# Altium PCB construction.PcbDoc
Units mm, origin at the board's own origin, x right, y up, seen from the top; angles counter-clockwise.
Board outline 204 x 297 mm, 2 copper layers (TopLayer, BottomLayer); 10 components, 162 nets, 348 pads, 0 vias.
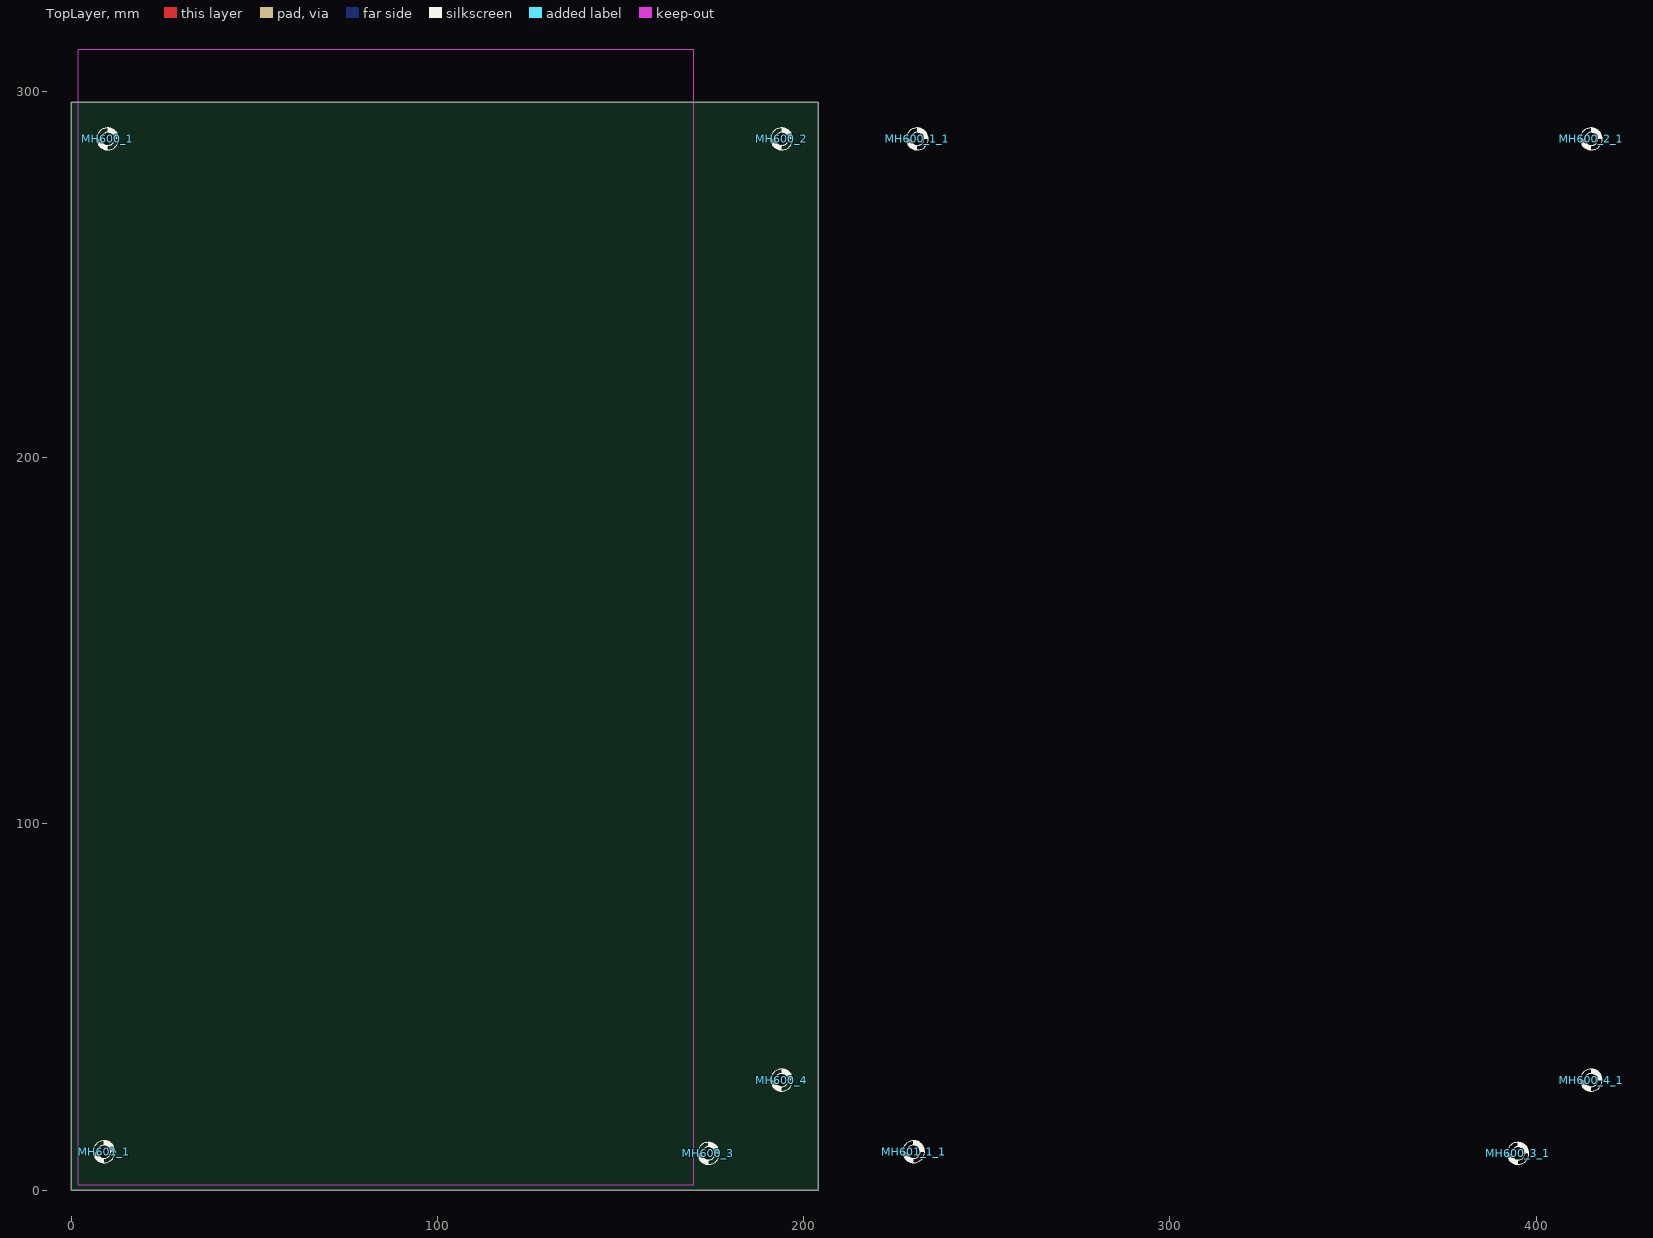
[diagram p0: TopLayer view]
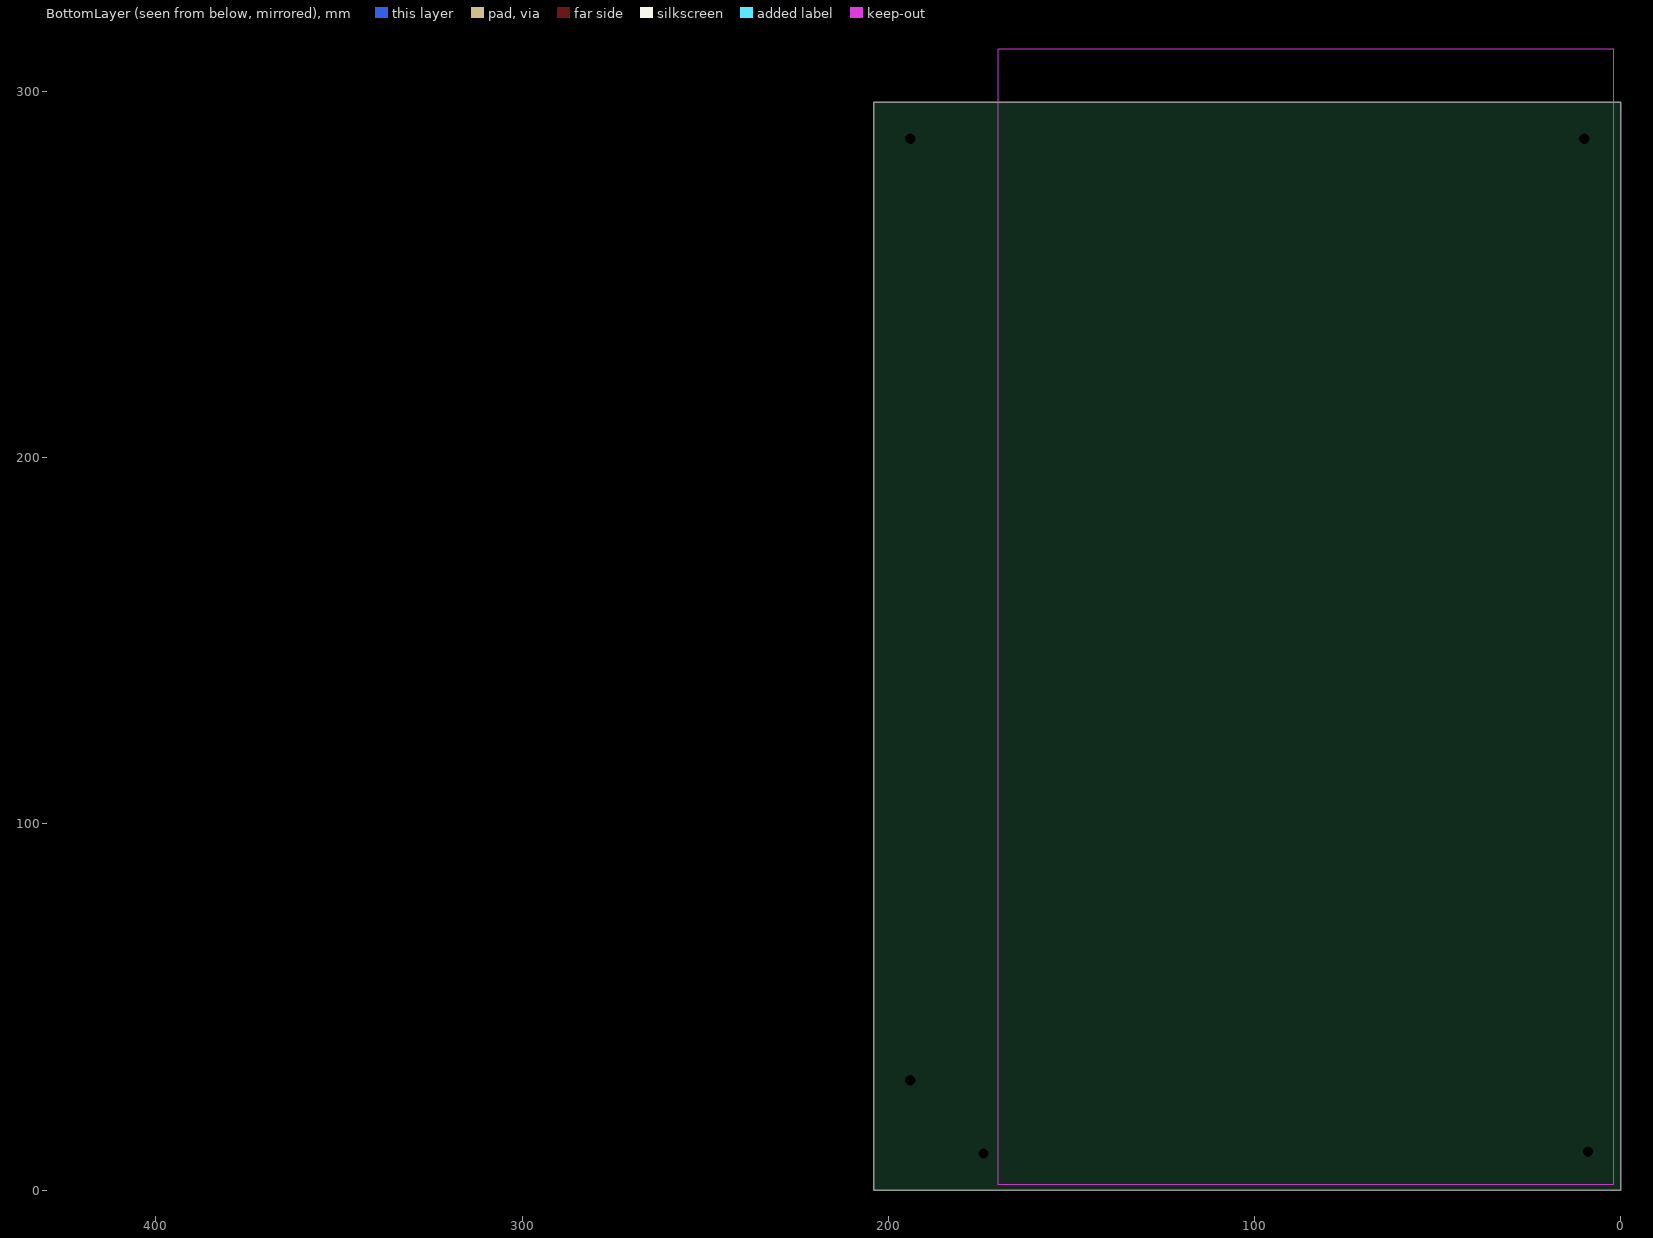
[diagram p1: BottomLayer view, seen from below]

## Layer stack, top to bottom
TopSolder: solder mask 0.0102, Solder Resist, Dk 3.5
TopLayer: signal copper 0.0356
Dielectric1: dielectric 0.32, FR-4, Dk 4.8
BottomLayer: signal copper 0.0356
BottomSolder: solder mask 0.0102, Solder Resist, Dk 3.5

## Board outline
0,0 0,297 204,297 204,0

## Design rules (kind name [scope] priority, off if disabled: settings)
Clearance Clearance_1 [All vs InPolygon] p1: gap=0.4 ignorepadtopadclearanceinfootprint=FALSE except(0: Arc-Hole Track-Hole SMDPad-Hole THPad-Hole Via-Hole Fill-Hole Poly-Hole Region-Hole Text-Hole)
Clearance [All] p2: gap=0.254 ignorepadtopadclearanceinfootprint=FALSE except(0: Arc-Hole Track-Hole SMDPad-Hole THPad-Hole Via-Hole Fill-Hole Poly-Hole Region-Hole Text-Hole)
ComponentClearance [All] p1: gap=0 collisioncheckmode=3 verticalgap=0 showdistances=FALSE
FabricationTestPointUsage TestPointUsage [All] p1: valid=0 allowmultiple=FALSE
FabricationTestpoint Testpoint [(IsPad And (OnTopLayer Or OnBottomLayer))] p1: side=3 testpointundercomponent=TRUE minsize=1.016 maxsize=2.54 preferedsize=1.524 minholesize=0.508 maxholesize=1.016 preferedholesize=0.813 testpointgrid=0.025 allowsidetop=TRUE allowsidebottom=TRUE usegrid=TRUE gridtolerance=0
HoleSize [All] p1: absolutevalues=TRUE maxlimit=4 minlimit=0.4 maxpercent=80.000 minpercent=20.000
HoleToHoleClearance [All] p1: gap=0.5 allowstackedmicrovias=TRUE
MinimumAnnularRing [All] p1: minimumring=0.18
MinimumSolderMaskSliver [All] p1: minsoldermaskwidth=0.15
PlaneClearance [All] p1: clearance=0.254
PlaneConnect [All] p1: planeconnectstyle=Relief reliefexpansion=0.508 reliefentries=4 reliefconductorwidth=0.381 reliefairgap=0.254
PolygonConnect PolygonConnect_1 [(InPadClass('All Pads'))] p1: connectstyle=Relief reliefconductorwidth=0.635 reliefentries=4 polygonreliefangle="90 Angle" airgapwidth=0.254
PolygonConnect [All] p2: connectstyle=Direct reliefconductorwidth=0.61 reliefentries=4 polygonreliefangle="90 Angle" airgapwidth=0.254
RoutingVias [All] p1: holewidth=0.4 width=0.8 viastyle="Through Hole" minholewidth=0.4 minwidth=0.8 maxholewidth=0.5 maxwidth=2
SilkToSilkClearance [All] p1: silktosilkclearance=0.1
SilkToSolderMaskClearance SilkscreenOverComponentPads [IsPad] p1: minsilkscreentomaskgap=0.2 clearancetoexposedcopper=TRUE
SolderMaskExpansion SolderMaskExpansion_VIA [(IsVia)] p1: expansion=-10
SolderMaskExpansion [All] p2: expansion=0.075
Width [All] p1: maxlimit=5.08 minlimit=0.203 preferedwidth=0.381 minimp=50.000000 maximp=50.000000 favimp=50.000000
20 further rules are at their usual default settings.

## Components (designator, comment, footprint, x,y, rotation, side; value= is the part's Value field where it differs from the comment)
MH600_1 "MH_2.8-2L" MH_2.8-2L 10,287 r0 top (schematic designator MH600)
MH600_1_1 "MH_2.8-2L" MH_2.8-2L 231,287 r0 top (schematic designator MH600)
MH600_2 "MH_2.8-2L" MH_2.8-2L 194,287 r0 top (schematic designator MH600)
MH600_2_1 "MH_2.8-2L" MH_2.8-2L 415,287 r0 top (schematic designator MH600)
MH600_3 "MH_2.8-2L" MH_2.8-2L 174,10 r180 top (schematic designator MH600)
MH600_3_1 "MH_2.8-2L" MH_2.8-2L 395,10 r180 top (schematic designator MH600)
MH600_4 "MH_2.8-2L" MH_2.8-2L 194,30 r180 top (schematic designator MH600)
MH600_4_1 "MH_2.8-2L" MH_2.8-2L 415,30 r180 top (schematic designator MH600)
MH601_1 "MH_2.8-2L" MH_2.8-2L 9,10.5 r0 top (schematic designator MH600)
MH601_1_1 "MH_2.8-2L" MH_2.8-2L 230,10.5 r0 top (schematic designator MH600)

## Footprints (in the part's own frame and the unit in brackets; to place one, negate y for a bottom-side part, rotate by r counter-clockwise, add the part's x,y. Pads: shape width x height; smd on the part's side, far side on the other; paste and mask are expansions set on the pad)
MH_2.8-2L [mm]
  round 0 hole 2.8 unplated: 0(0,0)
  silkscreen extent -2.99,-3.03 3.01,2.98

## Part data
MH600_1 MH600_1_1 MH600_2 MH600_2_1 MH600_3 MH600_3_1 MH600_4 MH600_4_1 MH601_1 MH601_1_1: library part MOUNTING_HOLE, "Mounting Hole"

## Free pads (board coordinates)
  oval 5.2x3.8 on Top Overlay paste+0: 1(4,29.5) 1(4,46.5) 1(4,63.5) 1(4,80.5) 1(4,97.5) 1(4,114.5) 1(4,131.5) 1(4,165.5) 1(4,182.5) 1(4,199.5) 1(4,216.5) 1(4,233.5) 1(4,250.5) 1(4,267.5) 1(12.5,21) 1(12.5,38) 1(12.5,55) 1(12.5,72) 1(12.5,89) 1(12.5,106) 1(12.5,123) 1(12.5,140) 1(12.5,157) 1(12.5,174) 1(12.5,191) 1(12.5,208) 1(12.5,225) 1(12.5,242) 1(12.5,259) 1(12.5,276) 1(21,12.5) 1(21,29.5) 1(21,46.5) 1(21,63.5) 1(21,80.5) 1(21,97.5) 1(21,114.5) 1(21,131.5) 1(21,148.5) 1(21,165.5) 1(21,182.5) 1(21,199.5) 1(21,216.5) 1(21,233.5) 1(21,250.5) 1(21,267.5) 1(21,284.5) 1(29.5,4) 1(29.5,21) 1(29.5,276) 1(29.5,293) 1(29.5,140) 1(29.5,157) 1(38,12.5) 1(38,284.5) 1(38,148.5) 1(46.5,4) 1(46.5,21) 1(46.5,276) 1(46.5,293) 1(46.5,140) 1(46.5,157) 1(55,12.5) 1(55,148.5) 1(55,284.5) 1(63.5,4) 1(63.5,21) 1(63.5,276) 1(63.5,293) 1(63.5,140) 1(63.5,157) 1(72,12.5) 1(72,148.5) 1(72,284.5) 1(80.5,4) 1(80.5,21) 1(80.5,276) 1(80.5,293) 1(80.5,140) 1(80.5,157) 1(89,12.5) 1(89,148.5) 1(89,284.5) 1(97.5,4) 1(97.5,21) 1(97.5,276) 1(97.5,293) 1(97.5,140) 1(97.5,157) 1(106,12.5) 1(106,148.5) 1(106,284.5) 1(114.5,4) 1(114.5,21) 1(114.5,276) 1(114.5,293) 1(114.5,140) 1(114.5,157) 1(123,12.5) 1(123,284.5) 1(123,148.5) 1(131.5,4) 1(131.5,21) 1(131.5,276) 1(131.5,293) 1(131.5,140) 1(131.5,157) 1(140,29.5) 1(140,46.5) 1(140,63.5) 1(140,80.5) 1(140,97.5) 1(140,114.5) 1(140,131.5) 1(140,165.5) 1(140,182.5) 1(140,199.5) 1(140,216.5) 1(140,233.5) 1(140,250.5) 1(140,267.5) 1(140,12.5) 1(140,148.5) 1(140,284.5) 1(148.5,21) 1(148.5,38) 1(148.5,55) 1(148.5,72) 1(148.5,89) 1(148.5,106) 1(148.5,123) 1(148.5,140) 1(148.5,157) 1(148.5,174) 1(148.5,191) 1(148.5,208) 1(148.5,225) 1(148.5,242) 1(148.5,259) 1(148.5,276) 1(157,29.5) 1(157,46.5) 1(157,63.5) 1(157,80.5) 1(157,97.5) 1(157,114.5) 1(157,131.5) 1(157,165.5) 1(157,182.5) 1(157,199.5) 1(157,216.5) 1(157,233.5) 1(157,250.5) 1(157,267.5) 1(182.5,4) 1(182.5,21) 1(182.5,106) 1(182.5,123) 1(182.5,174) 1(182.5,191) 1(191,12.5) 1(191,114.5) 1(191,182.5) 1(199.5,4) 1(199.5,21) 1(199.5,106) 1(199.5,123) 1(199.5,174) 1(199.5,191) 1(225,29.5) 1(225,46.5) 1(225,63.5) 1(225,80.5) 1(225,97.5) 1(225,114.5) 1(225,131.5) 1(225,165.5) 1(225,182.5) 1(225,199.5) 1(225,216.5) 1(225,233.5) 1(225,250.5) 1(225,267.5) 1(233.5,21) 1(233.5,38) 1(233.5,55) 1(233.5,72) 1(233.5,89) 1(233.5,106) 1(233.5,123) 1(233.5,140) 1(233.5,157) 1(233.5,174) 1(233.5,191) 1(233.5,208) 1(233.5,225) 1(233.5,242) 1(233.5,259) 1(233.5,276) 1(242,12.5) 1(242,29.5) 1(242,46.5) 1(242,63.5) 1(242,80.5) 1(242,97.5) 1(242,114.5) 1(242,131.5) 1(242,148.5) 1(242,165.5) 1(242,182.5) 1(242,199.5) 1(242,216.5) 1(242,233.5) 1(242,250.5) 1(242,267.5) 1(242,284.5) 1(250.5,4) 1(250.5,21) 1(250.5,276) 1(250.5,293) 1(250.5,140) 1(250.5,157) 1(259,12.5) 1(259,284.5) 1(259,148.5) 1(267.5,4) 1(267.5,21) 1(267.5,276) 1(267.5,293) 1(267.5,140) 1(267.5,157) 1(276,12.5) 1(276,148.5) 1(276,284.5) 1(284.5,4) 1(284.5,21) 1(284.5,276) 1(284.5,293) 1(284.5,140) 1(284.5,157) 1(293,12.5) 1(293,148.5) 1(293,284.5) 1(301.5,4) 1(301.5,21) 1(301.5,276) 1(301.5,293) 1(301.5,140) 1(301.5,157) 1(310,12.5) 1(310,148.5) 1(310,284.5) 1(318.5,4) 1(318.5,21) 1(318.5,276) 1(318.5,293) 1(318.5,140) 1(318.5,157) 1(327,12.5) 1(327,148.5) 1(327,284.5) 1(335.5,4) 1(335.5,21) 1(335.5,276) 1(335.5,293) 1(335.5,140) 1(335.5,157) 1(344,12.5) 1(344,284.5) 1(344,148.5) 1(352.5,4) 1(352.5,21) 1(352.5,276) 1(352.5,293) 1(352.5,140) 1(352.5,157) 1(361,29.5) 1(361,46.5) 1(361,63.5) 1(361,80.5) 1(361,97.5) 1(361,114.5) 1(361,131.5) 1(361,165.5) 1(361,182.5) 1(361,199.5) 1(361,216.5) 1(361,233.5) 1(361,250.5) 1(361,267.5) 1(361,12.5) 1(361,148.5) 1(361,284.5) 1(369.5,21) 1(369.5,38) 1(369.5,55) 1(369.5,72) 1(369.5,89) 1(369.5,106) 1(369.5,123) 1(369.5,140) 1(369.5,157) 1(369.5,174) 1(369.5,191) 1(369.5,208) 1(369.5,225) 1(369.5,242) 1(369.5,259) 1(369.5,276) 1(378,29.5) 1(378,46.5) 1(378,63.5) 1(378,80.5) 1(378,97.5) 1(378,114.5) 1(378,131.5) 1(378,165.5) 1(378,182.5) 1(378,199.5) 1(378,216.5) 1(378,233.5) 1(378,250.5) 1(378,267.5) 1(403.5,4) 1(403.5,21) 1(403.5,106) 1(403.5,123) 1(403.5,174) 1(403.5,191) 1(412,12.5) 1(412,114.5) 1(412,182.5) 1(420.5,4) 1(420.5,21) 1(420.5,106) 1(420.5,123) 1(420.5,174) 1(420.5,191)

## Nets (pads, with @x,y where several pads share a name; then routed paths per layer and width w, separated by ;. In a path a pad name is that pad's centre, name@x,y a point inside that pad or via, vN(x,y) a via of type N, cw(c..) or ccw(c..) an arc to the next point about the centre after c; other vN are vias at no path point)
1W: 
+3V3: 
+5V: 
+5V_IN: 
+VISO: 
ADR_01: 
ADR_02: 
ADR_04: 
ADR_08: 
ADR_10: 
ADR_20: 
ADR_40: 
ADR_80: 
E\N\_\T\X\1\2\: 
E\N\_\T\X\2\2\: 
EN_31: 
EN_32: 
EN_41: 
EN_42: 
EN_RX11: 
EN_RX12: 
EN_RX21: 
EN_RX22: 
EN_TX11: 
EN_TX12: 
EN_TX21: 
EN_TX22: 
GND: 
GND1: 
GND34: 
I\D\B\S\Y\: 
IDEXT: 
IDSCL: 
IDSDA: 
IDVOLT: 
INT_RX1: 
INT_RX2: 
INT_RX3: 
INT_RX4: 
INT_TX1: 
INT_TX2: 
INT_TX3: 
INT_TX4: 
MISO: 
MOSI: 
NetC901_2: 
NetD100_1: 
NetD100_2: 
NetD101_K: 
NetD102_K: 
NetD103_K: 
NetD104_K: 
NetD105_1: 
NetD105_2: 
NetD200_1: 
NetD200_2: 
NetD201_K: 
NetD202_K: 
NetD203_K: 
NetD204_K: 
NetD205_1: 
NetD205_2: 
NetD300_K: 
NetD301_K: 
NetD302_1: 
NetD302_2: 
NetD400_K: 
NetD401_K: 
NetD402_1: 
NetD402_2: 
NetD905_1: 
NetD907_1: 
NetJ100_1: 
NetJ101_1: 
NetJ200_1: 
NetJ201_1: 
NetJ300_1: 
NetJ400_1: 
NetJ900_1A: 
NetJ900_5A: 
NetJ900_7A: 
NetJ900_11A: 
NetJ900_29B: 
NetJ900_30A: 
NetJ900_30B: 
NetJ900_31A: 
NetJ900_31B: 
NetJ900_32A: 
NetJ900_32B: 
NetLED500_2: 
NetLED500_4: 
NetLED501_2: 
NetLED501_4: 
NetR102_1: 
NetR103_1: 
NetR107_1: 
NetR107_2: 
NetR108_2: 
NetR109_1: 
NetR117_1: 
NetR118_2: 
NetR202_1: 
NetR203_1: 
NetR207_1: 
NetR207_2: 
NetR208_2: 
NetR209_1: 
NetR217_1: 
NetR218_2: 
NetR300_2: 
NetR301_1: 
NetR303_1: 
NetR309_1: 
NetR310_2: 
NetR400_2: 
NetR401_1: 
NetR403_1: 
NetU103_3: 
NetU103_4: 
NetU203_3: 
NetU203_4: 
NetU204_5: 
NetU204_6: 
NetU301_2: 
NetU301_3: 
NetU301_4: 
NetU401_2: 
NetU401_3: 
NetU401_4: 
RST: 
RX11+: 
RX11+/TX11+: 
RX11-: 
RX11-/TX11-: 
RX12+/TX12+: 
RX12-/TX12-: 
RX21+: 
RX21+/TX21+: 
RX21-: 
RX21-/TX21-: 
RX22+/TX22+: 
RX22-/TX22-: 
RX31+/TX31+: 
RX31-/TX31-: 
RX32+/TX32+: 
RX32-/TX32-: 
RX41+/TX41+: 
RX41-/TX41-: 
RX42+/TX42+: 
RX42-/TX42-: 
SCK: 
SEL_12: 
TX12+: 
TX12-: 
TX22+: 
TX22-: 
UCLED0: 
UCLED1: 
UCLED2: 
UCLED3: 
VCC1: 
VCC34: 
pads on no net: MH600_1.0 MH600_1_1.0 MH600_2.0 MH600_2_1.0 MH600_3.0 MH600_3_1.0 MH600_4.0 MH600_4_1.0 MH601_1.0 MH601_1_1.0

## Keep-outs
KeepOutLayer:
  lines w0.2: 2,1.5 170,1.5 170,311.5 2,311.5 2,1.5

## Silkscreen, mask and mechanical layers (free items; w line width, h text height)
Mechanical Design:
  lines w0.305: 140,233.5 202,171.5 ; 361,233.5 423,171.5 ; 202,1.5 140,63.5 202,125.5 ; 202,1.5 180,1.5 180,23.5 202,23.5 202,1.5 ; 202,125.5 180,125.5 180,103.5 202,103.5 202,125.5 ; 202,171.5 180,171.5 180,193.5 202,193.5 202,171.5 ; 423,1.5 361,63.5 423,125.5 ; 423,1.5 423,23.5 401,23.5 401,1.5 423,1.5 ; 423,125.5 423,103.5 401,103.5 401,125.5 423,125.5 ; 423,171.5 423,193.5 401,193.5 401,171.5 423,171.5 ; 2,28.5 12.5,18 23,28.5 23,132.5 12.5,143 2,132.5 2,28.5 ; 2,164.5 12.5,154 23,164.5 23,268.5 12.5,279 2,268.5 2,164.5 ; 4.5,271 4.5,271 ; 18,12.5 28.5,2 132.5,2 143,12.5 132.5,23 28.5,23 18,12.5 ; 18,148.5 28.5,138 132.5,138 143,148.5 132.5,159 28.5,159 18,148.5 ; 18,284.5 28.5,295 132.5,295 143,284.5 132.5,274 28.5,274 18,284.5 ; 20.5,26 20.5,26 ; 26,4.5 26,4.5 ; 26,276.5 26,276.5 ; 135,156.5 135,156.5 ; 138,28.5 148.5,18 159,28.5 159,132.5 148.5,143 138,132.5 138,28.5 ; 138,164.5 148.5,154 159,164.5 159,268.5 148.5,279 138,268.5 138,164.5 ; 156.5,26 156.5,26 ; 156.5,162 156.5,162 ; 223,28.5 223,132.5 233.5,143 244,132.5 244,28.5 233.5,18 223,28.5 ; 223,164.5 223,268.5 233.5,279 244,268.5 244,164.5 233.5,154 223,164.5 ; 225.5,271 225.5,271 ; 239,12.5 249.5,23 353.5,23 364,12.5 353.5,2 249.5,2 239,12.5 ; 239,148.5 249.5,159 353.5,159 364,148.5 353.5,138 249.5,138 239,148.5 ; 239,284.5 249.5,274 353.5,274 364,284.5 353.5,295 249.5,295 239,284.5 ; 241.5,26 241.5,26 ; 247,4.5 247,4.5 ; 247,276.5 247,276.5 ; 356,156.5 356,156.5 ; 359,28.5 359,132.5 369.5,143 380,132.5 380,28.5 369.5,18 359,28.5 ; 359,164.5 359,268.5 369.5,279 380,268.5 380,164.5 369.5,154 359,164.5 ; 377.5,26 377.5,26 ; 377.5,162 377.5,162
Outline:
  lines w1: 0,0 204,0 204,297 0,297 0,0 ; 221,0 221,297 425,297 425,0 221,0

## Dimensions
225,46.5 to 199.5,21 on Mechanical Design
182.5,21 to 157,46.5 on Mechanical Design
221,0 to 204,0 on Mechanical Design
63.5,21 to 46.5,21 on Mechanical Design
21,97.5 to 21,114.5 on Mechanical Design
4,63.5 to 12.5,55 on Mechanical Design
0,0 to 204,0 on Dimensions
204,0 to 204,296.958 on Dimensions